# Altium PCB pcb_wires.PcbDoc
Units mm, origin at the board's own origin, x right, y up, seen from the top; angles counter-clockwise.
Board outline 9 x 12 mm, 2 copper layers (Top Layer, Bottom Layer); 14 components, 10 nets, 43 pads, 0 vias.
Unrouted connection lines stored in the file: 9.
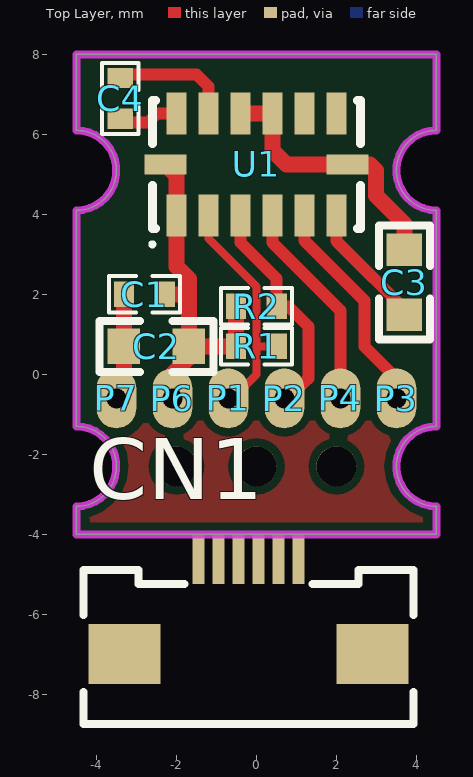
[diagram p0: Top Layer view]
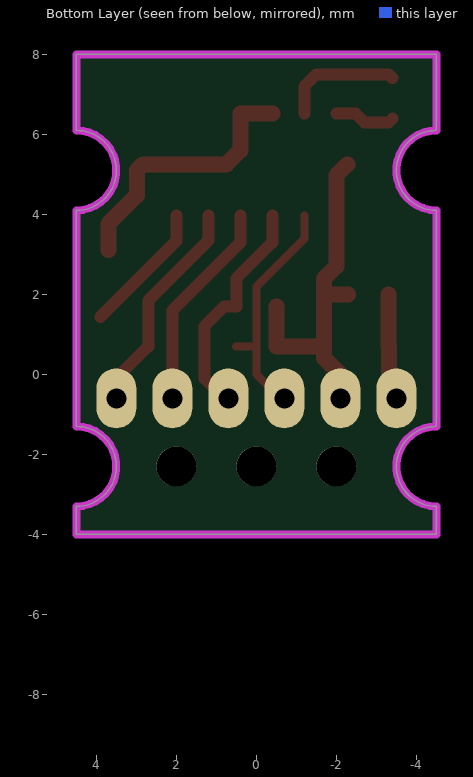
[diagram p1: Bottom Layer view, seen from below]
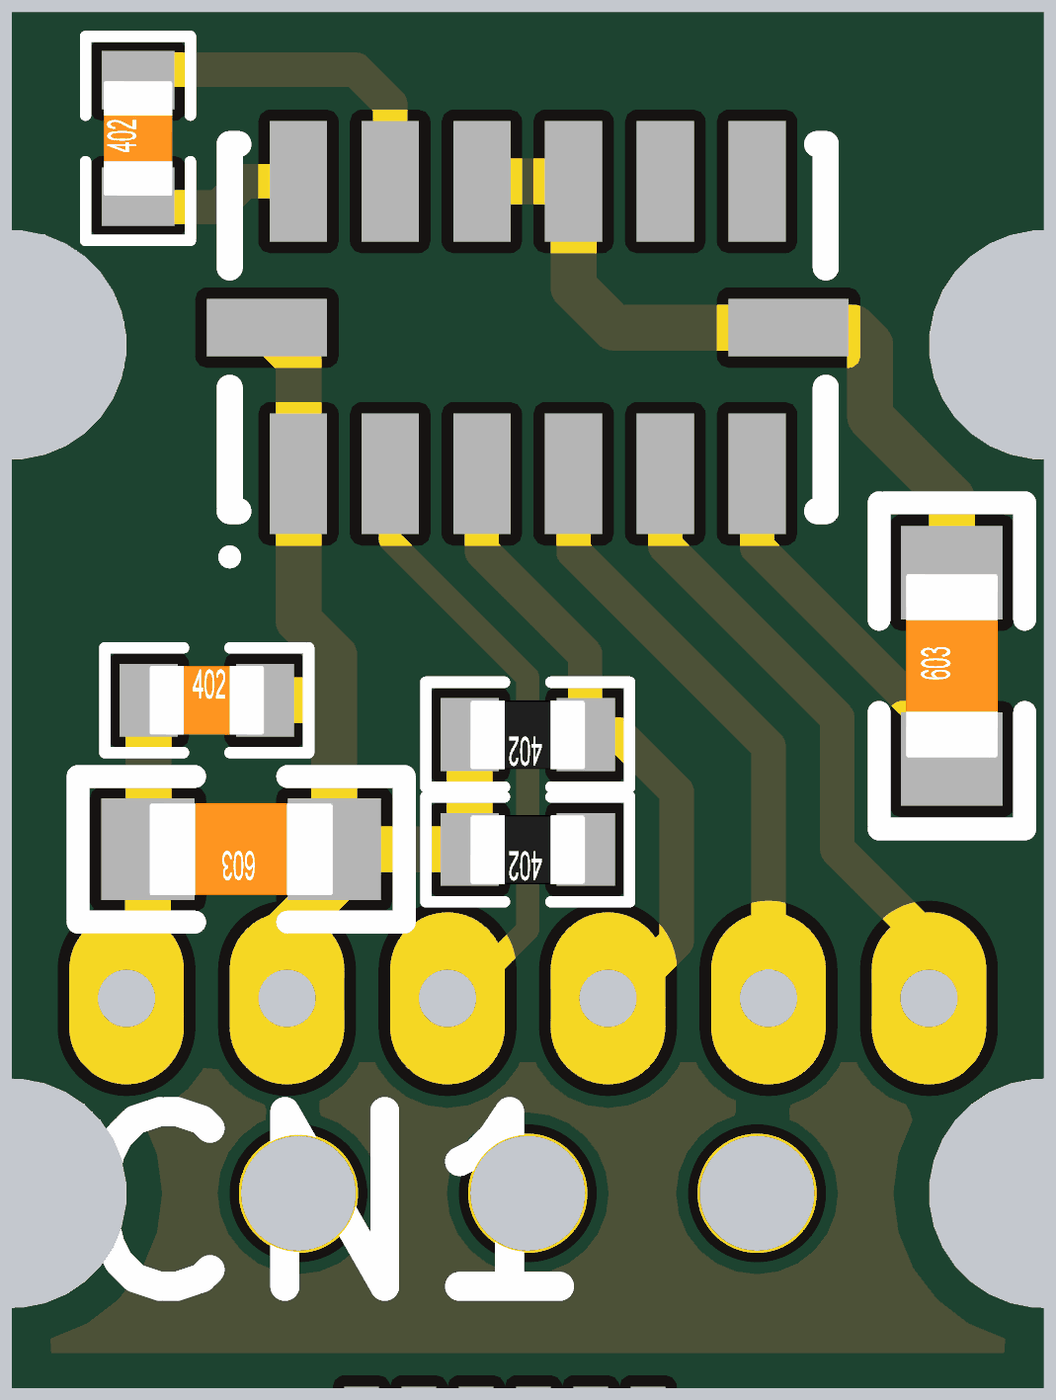
[diagram p2: 3D render of the assembled board from above, using the file's embedded part models]

## Layer stack, top to bottom
Top Solder: solder mask 0.0102, Solder Resist, Dk 3.5
Top Layer: signal copper 0.0356
Dielectric1: dielectric 0.32, FR-4, Dk 4.8
Bottom Layer: signal copper 0.0356
Bottom Solder: solder mask 0.0102, Solder Resist, Dk 3.5

## Board outline
-4.5,-4 -4.5,-3.3 ccw(c-4.5,-2.3) -4.5,-1.3 -4.5,4.1 ccw(c-4.5,5.1) -4.5,6.1 -4.5,8 4.5,8 4.5,6.1 ccw(c4.5,5.1) 4.5,4.1 4.5,-1.3 ccw(c4.5,-2.3) 4.5,-3.3 4.5,-4

## Design rules (kind name [scope] priority, off if disabled: settings)
Clearance [All] p1: gap=0.2
FabricationTestPointUsage TestPointUsage [All] p1: valid=0 allowmultiple=FALSE
FabricationTestpoint Testpoint [All] p1: side=3 testpointundercomponent=TRUE minsize=1.016 maxsize=2.54 preferedsize=1.524 minholesize=0 maxholesize=1.016 preferedholesize=0.813 testpointgrid=0.025 allowsidetop=TRUE allowsidebottom=TRUE usegrid=TRUE gridtolerance=0
PlaneConnect [All] p1: planeconnectstyle=Relief reliefexpansion=0.508 reliefentries=4 reliefconductorwidth=0.4 reliefairgap=0.4
PolygonConnect [All] p1: connectstyle=Relief reliefconductorwidth=0.254 reliefentries=4 polygonreliefangle="90 Angle" airgapwidth=0.254
RoomDefinition sch [InComponentClass('sch')] p1: confinementstyle=ConfineIn formatcopy=TRUE lockcomponents=FALSE outline -29.537,-20.473 25.835,-20.473 25.835,24.18 -29.537,24.18
RoutingVias [All] p1: holewidth=0.5 width=1.2 viastyle="Through Hole" minholewidth=0.5 minwidth=1.2 maxholewidth=0.5 maxwidth=1.2
SolderMaskExpansion [All] p1: expansion=0.102
Width [All] p1: maxlimit=0.4 minlimit=0.2 preferedwidth=0.4 minimp=50.000000 maximp=50.000000 favimp=50.000000
27 further rules are at their usual default settings.

## Components (designator, comment, footprint, x,y, rotation, side; value= is the part's Value field where it differs from the comment)
C1 "100nF" C0402 -2.8,2 r0 top
C2 "4,7uF" C0603 -2.5,0.7 r180 top
C3 "4,7uF" C0603 3.7,2.3 r90 top
C4 "220nF" C0402 -3.4,6.9 r90 top
CN1 "JOINT TECH F0500WR-S-06PT" F0500WR-S-06PT -0.2,-5.8 r0 top
P1 "CablePAD" PADTHT1.5x2mm -0.7,-0.6 r0 top
P2 "CablePAD" PADTHT1.5x2mm 0.7,-0.6 r0 top
P3 "CablePAD" PADTHT1.5x2mm 3.5,-0.6 r0 top
P4 "CablePAD" PADTHT1.5x2mm 2.1,-0.6 r0 top
P6 "CablePAD" PADTHT1.5x2mm -2.1,-0.6 r0 top
P7 "CablePAD" PADTHT1.5x2mm -3.5,-0.6 r0 top
R1 "4k3" R0402 0,0.7 r180 top
R2 "4k3" R0402 0,1.7 r180 top
U1 "LSM303DLHC" LGA80P500X300-14N 0,5.25 r90 top

## Footprints (in the part's own frame and the unit in brackets; to place one, negate y for a bottom-side part, rotate by r counter-clockwise, add the part's x,y. Pads: shape width x height; smd on the part's side, far side on the other; paste and mask are expansions set on the pad)
C0402 [mil]
  rect 20x25 smd: 1(-20,0) 2(20,0)
  silkscreen extent -35,-18 35,18, body extent -20,-12 20,12, height 8
C0603 [mil]
  rect 32x35 smd: 1(32,0) 2(-32,0)
  silkscreen extent -56,-25 56,25, body extent -31,-16 32,16, height 12
F0500WR-S-06PT [mm]
  rect 0.3x1.25 smd: 1(-1.25,1.188) 2(-0.75,1.188) 3(-0.25,1.188) 4(0.25,1.188) 5(0.75,1.188) 6(1.25,1.188)
  rect 1.8x1.5 smd: M1(-3.1,-1.187) M2(3.1,-1.187)
  silkscreen extent -4.13,-2.94 4.13,0.91, body extent -4.1,-2.9 4.1,1.4, height 2
LGA80P500X300-14N [mm]
  rect 1.05x0.5 smd: 1(-1.275,2) 2(-1.275,1.2) 3(-1.275,0.4) 4(-1.275,-0.4) 5(-1.275,-1.2) 6(-1.275,-2) 8(1.275,-2) 9(1.275,-1.2) 10(1.275,-0.4) 11(1.275,0.4) 12(1.275,1.2) 13(1.275,2)
  rect 0.5x1.05 smd: 7(0,-2.275) 14(0,2.275)
  silkscreen extent -2.05,-2.6 1.6,2.65, body extent -1.57,-2.57 1.58,2.58, height 0.92
PADTHT1.5x2mm [mm]
  oval 1x1.5 hole 0.5: 0(0,0)
R0402 [mil]
  rect 20x25 smd: 1(-20,0) 2(20,0)
  silkscreen extent -35,-18 35,18, body extent -20,-12 20,12, height 8

## Part data
C1 C2 C3 C4: library part Cap, "Capacitor"
CN1: "0.50mm Pitch FFC/FPC Connector, SMT, Right Angle, ZIF, Top Contact Style Receptacle, 6 Circuits"
P1 P2 P3 P4 P6 P7: "Cable PAD"
R1 R2: library part Res, "Resistor"
U1: "Ultra compact high performance e-compass 3D accelerometer and  3D magnetometer module"

## Free pads (board coordinates)
  round 1 hole 1: 2(-2,-2.3) 2(0,-2.3) 2(2,-2.3)

## Nets (pads, with @x,y where several pads share a name; then routed paths per layer and width w, separated by ;. In a path a pad name is that pad's centre, name@x,y a point inside that pad or via, vN(x,y) a via of type N, cw(c..) or ccw(c..) an arc to the next point about the centre after c; other vN are vias at no path point)
3V3: C1.2 C2.2 CN1.2 P6.0 R1.2 R2.2 U1.1 U1.14 | length 9.3
  Top Layer w0.4: C1.2 -1.687,2 ; U1.14 -2,4.975 U1.1 -2,2.7 -1.687,2.387 -1.687,2 ; P6.0@-2.1,-0.9 -2.1,0 -1.687,0.413 C2.2 ; R2.2 R1.2 C2.2 ; C2.2 -1.687,2
DRDY: U1.9
GND: C1.1 C2.1 C3.1 CN1.1 CN1.M1 CN1.M2 P7.0 U1.7 U1.10 U1.11 | length 9.8
  Top Layer w0.4: P7.0@-3.5,-0.9 -3.5,-0.1 -3.313,0.087 C2.1 -3.308,0.705 C1.1 ; U1.11 U1.10 0.4,5.6 0.75,5.25 U1.7 2.837,5.25 2.987,5.1 2.987,4.473 3.7,3.76 C3.1
INT1: CN1.6 P3.0 U1.5 | length 5.8
  Top Layer w0.3: U1.5 1.2,3.346 2.7,1.846 2.7,0.7 3.5,-0.1 P3.0@3.5,-0.9
INT2: CN1.5 P4.0 U1.4 | length 5.5
  Top Layer w0.3: U1.4 0.4,3.297 2.1,1.597 2.1,-0.755 P4.0@2.078,-0.778
NetC3_2: C3.2 U1.6 | length 3.3
  Top Layer w0.3: U1.6 2,3.334 C3.2@3.897,1.437
NetC4_1: C4.1 U1.13 | length 1.5
  Top Layer w0.3: C4.1 -3.308,6.3 -2.7,6.3 -2.475,6.525 U1.13
NetC4_2: C4.2 U1.12 | length 3
  Top Layer w0.3: C4.2 -3.308,7.5 -1.5,7.5 -1.2,7.2 U1.12
SCL: CN1.3 P1.0 R1.1 U1.2 | length 6.1
  Top Layer w0.2: U1.2 -1.2,3.4 0,2.2 0,2 0,0 -0.7,-0.7 P1.0@-0.7,-0.9 ; 0.046,0.7 R1.1
SDA: CN1.4 P2.0 R2.1 U1.3 | length 5.8
  Top Layer w0.3: U1.3 -0.4,3.3 0.5,2.4 0.5,1.7 0.8,1.7 1.3,1.2 1.3,-0.1 P2.0@0.7,-0.7
pads on no net: U1.8

## Polygon pours and split planes (outlines as drawn)
GND on Top Layer "Top Layer-No Net" (solid, pour order 2): -4.5,8 -4.5,-4 4.5,-4 4.5,8

## Keep-outs
Keep-Out Layer:
  the board outline again, w0.2

## Other copper
Top Layer:
  pour cut-out: -4.5,8 4.5,8 4.5,2.5 -1,2.5 -4.5,2.5 -4,2.5 -4.5,2.5 -4.5,3 -4.5,5.5

## Silkscreen, mask and mechanical layers (free items; w line width, h text height)
Mechanical 16:
  lines w0.127: -146.1,-39.74 -141.02,-39.74 ; -146.1,8.52 -141.02,8.52 ; -146.1,56.78 -141.02,56.78 ; -73.075,-88 -73.075,-82.92 ; -73.075,99.96 -73.075,105.04 ; -8.94,-82.92 26.62,-82.92 140.92,-82.92 ; -0.05,-88 -0.05,-82.92 ; -0.05,99.96 -0.05,105.04 ; 21.007,-82.895 21.032,-82.92 ; 35.842,-82.906 35.842,-59.818 140.913,-59.818 ; 35.868,-67.336 140.887,-67.336 ; 35.893,-75.312 140.887,-75.312 ; 54.823,-82.906 54.823,-75.312 ; 54.843,-79.325 140.887,-79.325 ; 72.975,-88 72.975,-82.92 ; 72.975,99.96 72.975,105.04 ; 86.363,-82.855 86.363,-75.337 ; 115.293,-75.312 115.293,-59.818 ; 130.318,-67.336 130.318,-59.821 ; 140.92,-39.74 146,-39.74 ; 140.92,8.52 146,8.52 ; 140.92,56.78 146,56.78 ; 140.92,-82.92 -141.02,-82.92 -141.02,99.96 140.92,99.96 140.92,-57.647 140.92,-82.92 ; -146.1,-88 146,-88 146,105.04 -146.1,105.04 -146.1,-88
  text "1" at -109.854,101.611 h1.78
  text "2" at -37.21,101.611 h1.78
  text "3" at 35.942,101.611 h1.78
  text "4" at 108.84,101.611 h1.78
  text "A" at -144.195,78.599 h1.78
  text "A" at 142.825,78.599 h1.78
  text "B" at -144.195,30.542 h1.78
  text "B" at 142.825,30.542 h1.78
  text "C" at -144.195,-17.972 h1.78
  text "C" at 142.825,-17.972 h1.78
  text "PROJECT NAME:" at 36.757,-61.824 h1.14
  text "REVISION:" at 116.207,-61.824 h1.14
  text "A4" at 133.668,-64.896 h2.29
  text "Project_Name" at 61.343,-65.228 h2.54
  text "0.0.0" at 119.493,-65.671 h1.78
  text "D" at -144.195,-65.978 h1.78
  text "D" at 142.825,-65.978 h1.78
  text "PROJECT NUMBER:" at 116.182,-69.343 h1.14
  text "TITLE:" at 36.731,-69.419 h1.14
  text "PCB_TITLE" at 66.55,-73.381 h2.16
  text "ONW-000" at 123.668,-73.52 h1.78
  text "DATE:" at 36.858,-77.521 h1.14
  text "NAME_1" at 104.626,-78.005 h1.52
  text "X" at 66.045,-78.08 h1.52
  text "DRAWN BY:" at 87.43,-78.081 h1.52
  text "of" at 69.728,-78.156 h1.52
  text "Y" at 74.148,-78.156 h1.52
  text "SHEET" at 56.266,-78.182 h1.52
  text "DD-MM-YYYY" at 38.027,-81.636 h1.52
  text "NAME_2" at 104.652,-81.637 h1.52
  text "CHECKED BY:" at 87.405,-81.764 h1.52
  text ".PCB_FILE_NAME_NO_PATH" at 56.165,-81.789 h1.52
  text "1" at -109.854,-86.349 h1.78
  text "2" at -37.21,-86.349 h1.78
  text "3" at 35.942,-86.349 h1.78
  text "4" at 108.84,-86.349 h1.78